# Altium PCB Medidor Sensor.PcbDoc
Units mm, origin at the board's own origin, x right, y up, seen from the top; angles counter-clockwise.
Board outline 44.78 x 57.65 mm, 2 copper layers (Top Layer, Bottom Layer), stack 1.575 mm thick; 70 components, 36 nets, 264 pads, 14 vias.
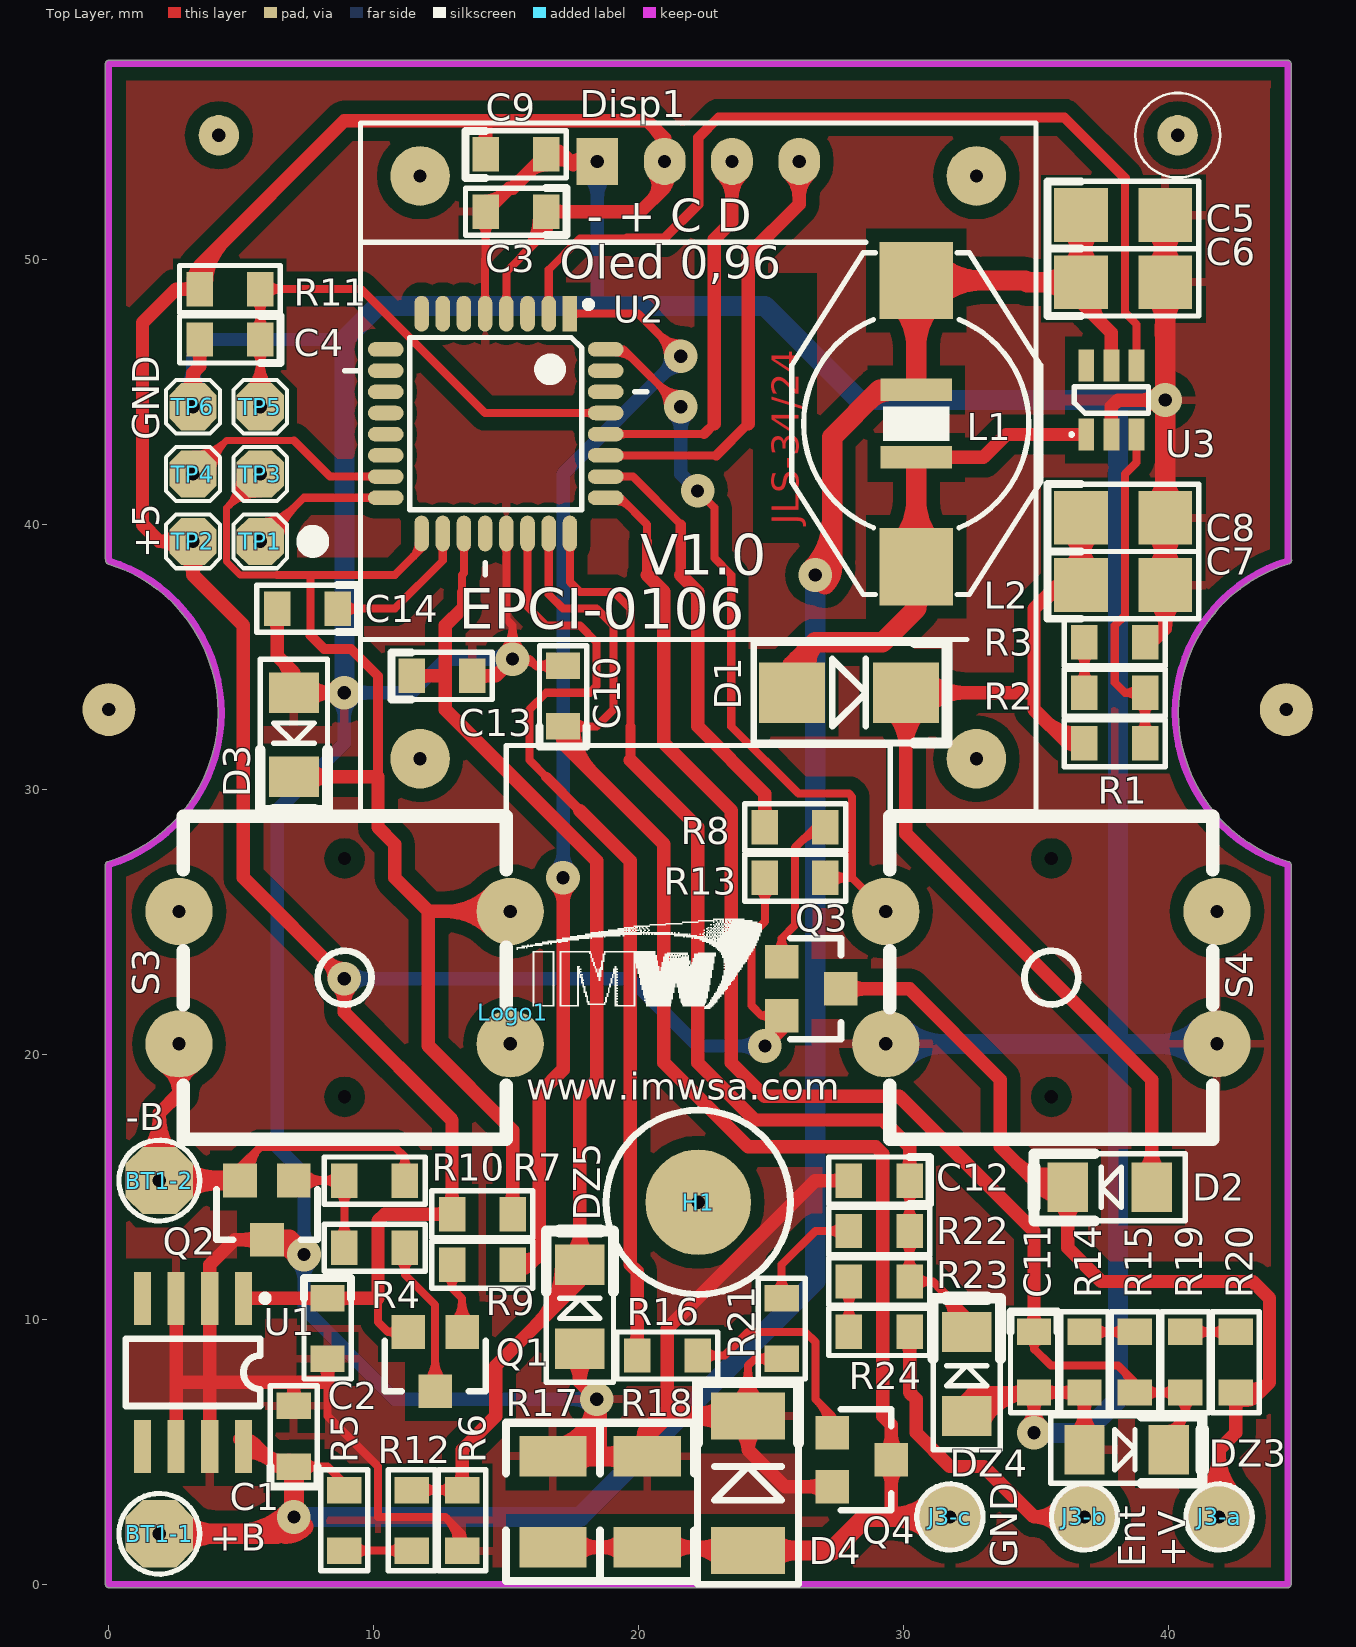
[diagram p0: Top Layer view]
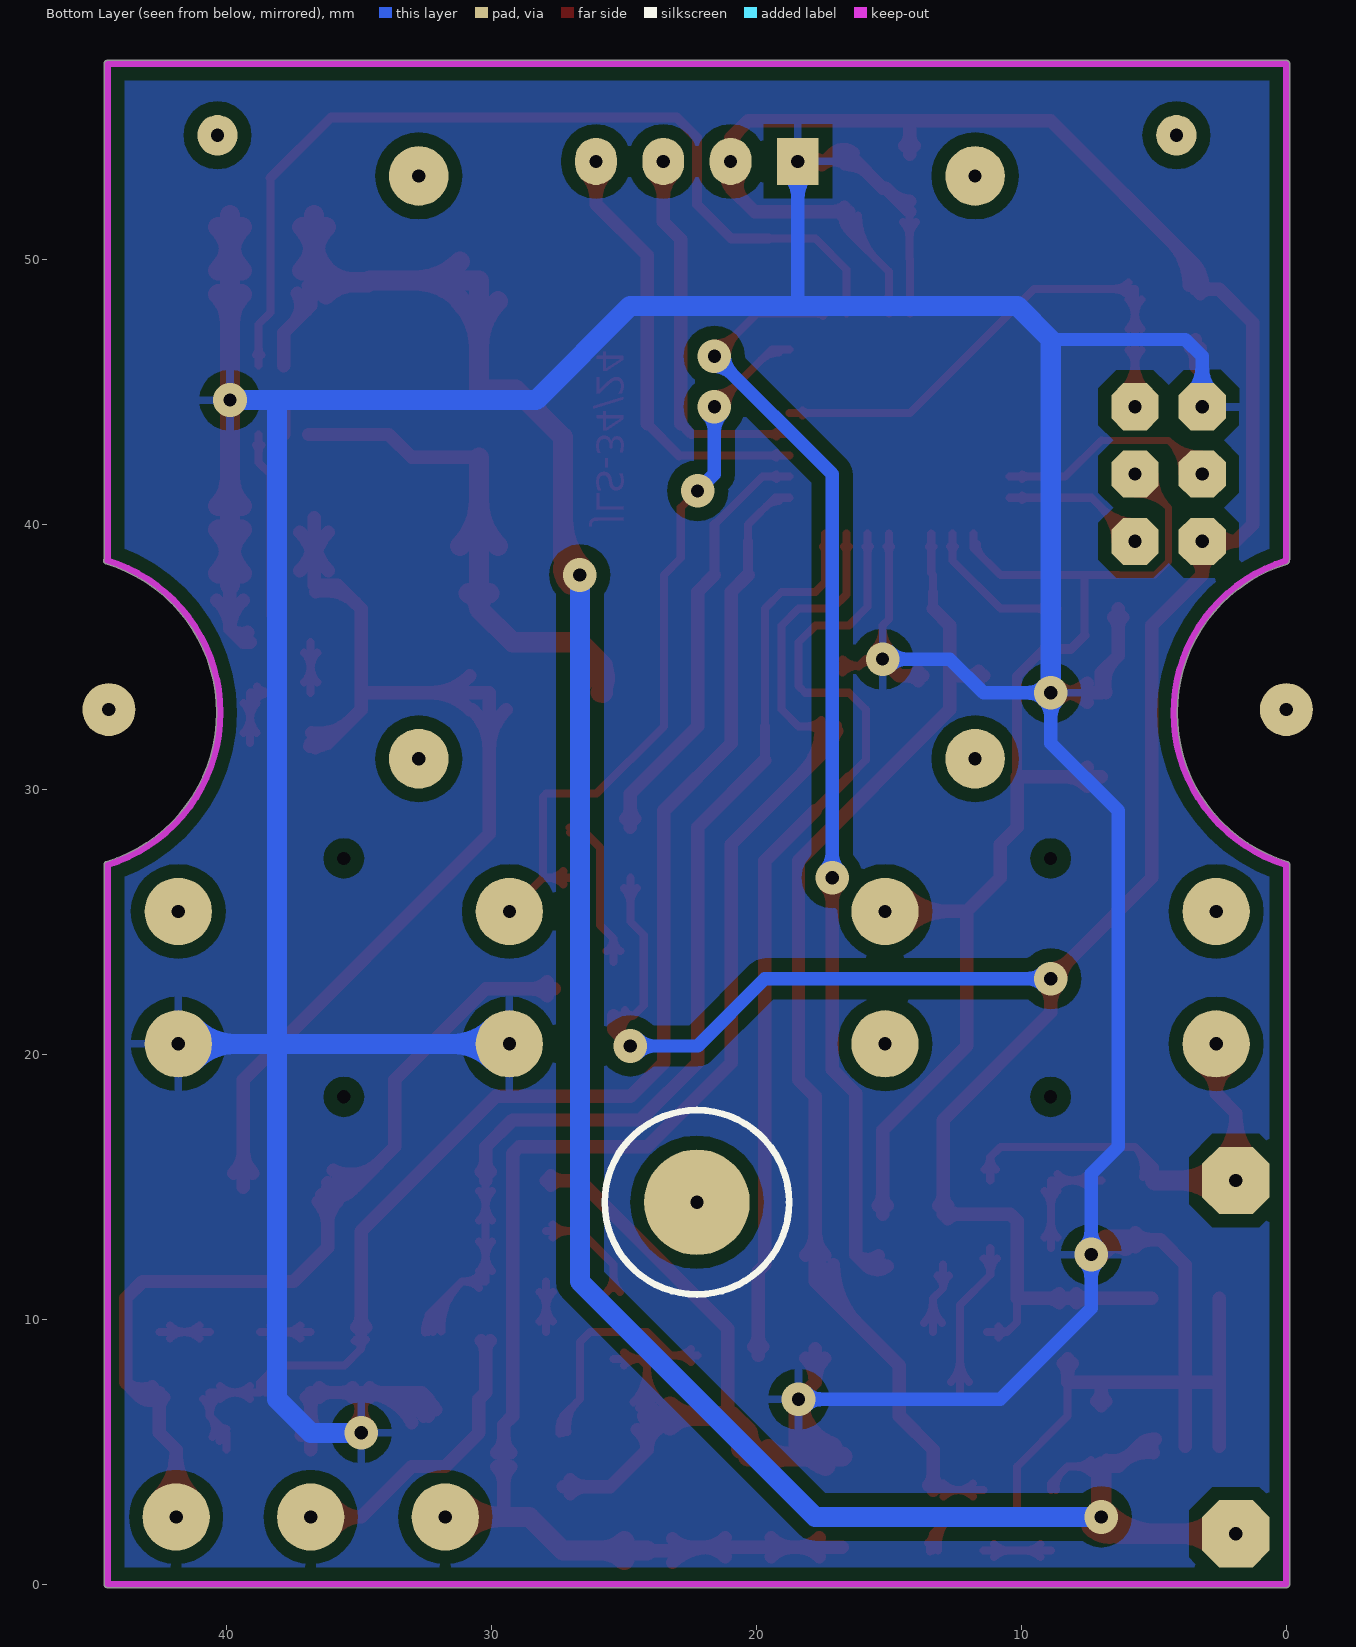
[diagram p1: Bottom Layer view, seen from below]
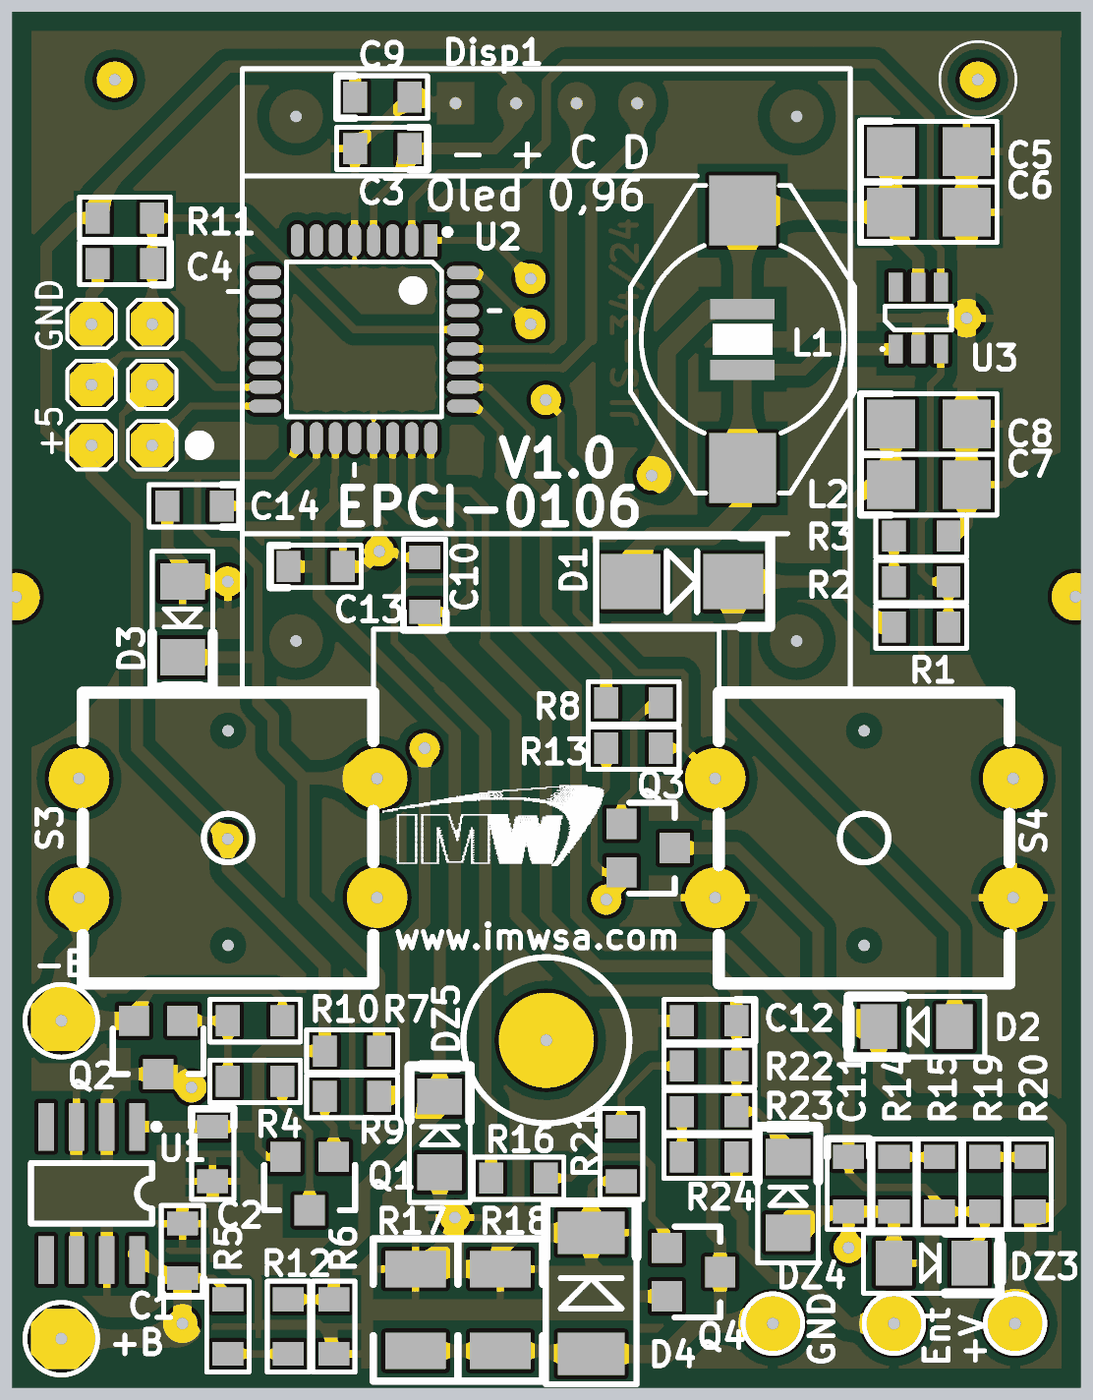
[diagram p2: 3D render of the assembled board from above, using the file's embedded part models]

## Layer stack, top to bottom
Top Layer: signal copper 0.0356
Dielectric: core 1.5037, FR-4, Dk 4.8
Bottom Layer: signal copper 0.0356

## Board outline
-0.127,0 -0.127,27.137 cw(c-0.002,27.16) -0.039,27.282 ccw(c-1.75,32.9) 4.123,32.9 ccw(c-1.75,32.9) -0.022,38.513 cw(c0.016,38.634) -0.111,38.647 cw(c0,38.71) -0.127,38.71 -0.127,57.4 cw(c0,57.4) 0.002,57.527 44.5,57.527 cw(c44.5,57.4) 44.627,57.4 44.627,38.713 cw(c44.52,38.645) 44.647,38.645 cw(c44.52,38.645) 44.556,38.523 cw(c46.25,32.9) 44.556,38.523 ccw(c46.25,32.9) 44.539,27.282 cw(c44.502,27.16) 44.63,27.16 cw(c44.502,27.16) 44.627,27.137 44.627,0 cw(c44.5,0) 44.5,-0.127 0,-0.127 cw(c0,0)

## Design rules (kind name [scope] priority, off if disabled: settings)
Clearance Poly [inpoly] p1: gap=0.508
Clearance Clearance_1 [All] p2: gap=0.229
ComponentClearance [All] p1 off: gap=0.254 collisioncheckmode=3 verticalgap=0.254 showdistances=FALSE
FanoutControl Fanout_BGA [IsBGA] p1 off: bgadir=Out bgaviamode=Centered fanoutstyle=Auto fanoutdirection=Alternating viagrid=0.025 // Fanout_BGA (Default Rule)
FanoutControl Fanout_LCC [IsLCC] p2 off: bgadir=Out bgaviamode=Centered fanoutstyle=Auto fanoutdirection=Alternating viagrid=0.025 // Fanout_LCC (Default Rule)
FanoutControl Fanout_SOIC [IsSOIC] p3 off: bgadir=Out bgaviamode=Centered fanoutstyle=Auto fanoutdirection=Alternating viagrid=0.025 // Fanout_SOIC (Default Rule)
HoleSize [All] p1: absolutevalues=TRUE maxlimit=5 minlimit=0.025 maxpercent=80.000 minpercent=20.000
PolygonConnect [All] p1: connectstyle=Relief reliefconductorwidth=0.305 reliefentries=4 polygonreliefangle="90 Angle"
RoutingVias [All] p1: holewidth=0.6 width=1.397 viastyle="Through Hole" minholewidth=0.5 minwidth=1.27 maxholewidth=0.75 maxwidth=1.524
SolderMaskExpansion [All] p1: expansion=0.178
TestPointUsage [All] p1: valid=0 allowmultiple=FALSE
Testpoint [All] p1: side=15 testpointundercomponent=TRUE minsize=1.016 maxsize=2.54 preferedsize=1.524 minholesize=0 maxholesize=1.016 preferedholesize=0.813 testpointgrid=0.025 style=1023 order=0123456789
Width [All] p1: maxlimit=0.762 minlimit=0.203 preferedwidth=0.305 bottomlayer_minwidth=0.508 bottomlayer_prefwidth=0.508 minimp=50.000000 maximp=50.000000 favimp=50.000000
14 further rules are at their usual default settings.

## Components (designator, comment, footprint, x,y, rotation, side; value= is the part's Value field where it differs from the comment)
BT1-1 "TEST POINT" TP_1#1 1.905,1.905 r90 top
BT1-2 "TEST POINT" TP_1#1 1.905,15.24 r90 top
C1 "10uF/50V" C0805MINIMO 6.985,4.445 r90 top
C2 "100nF" C0805MINIMO 8.255,10.795 r270 top
C3 "100nF" C0805MINIMO 16.51,51.816 r180 top
C4 "100nF" C0805MINIMO 5.715,46.99 r180 top
C5 "10uF 50V X5R" C1206 36.703,51.689 r0 top
C6 "10uF 50V X5R" C1206 36.703,49.149 r0 top
C7 "10uF 50V X5R" C1206 36.703,37.719 r0 top
C8 "10uF 50V X5R" C1206 36.703,40.259 r0 top
C9 "100nF" C0805MINIMO 14.224,53.975 r0 top
C10 "100nF" C0805MINIMO 17.145,32.385 r90 top
C11 "100nF" C0805MINIMO 34.925,9.525 r270 top
C12 "100nF" C0805MINIMO 30.226,15.24 r180 top
C13 "100nF" C0805MINIMO 11.43,34.29 r0 top
C14 "100nF" C0805MINIMO 8.636,36.83 r180 top
D1 "B340LB-13-F" smb 27.94,33.655 r180 top
D2 "MBR0520LT1G" DL35 39.37,14.986 r0 top
D3 "MBR0520LT1G" DL35 6.985,33.655 r90 top
D4 "1N4007" DL45 24.13,1.27 r270 top
Disp1 "O_led 0.96" "Oled 0.96 Nodotech" 22.25,42.164 r0 top locked
DZ3 "5V1 .5W" DL35 36.83,5.08 r180 top
DZ4 "5V1 .5W" DL35 32.385,6.35 r270 top
DZ5 "5V1 .5W" DL35 17.78,8.89 r270 top
H1 "TORNILLO" Tornillo 22.25,14.42 r0 top locked
J3-a "+V" TP_1#2 41.91,2.54 r90 top
J3-b "Ent" TP_1#2 36.83,2.54 r90 top
J3-c "GND" TP_1#2 31.75,2.54 r90 top
L1 "10uHy" L1210 30.48,43.815 r270 top
L2 "22uHy" SMTDR0804 30.48,43.815 r270 top
Logo1 "LOGO" "IMW Serigrafía" 15.24,21.59 r0 top
Q1 "BC807" "SOT23 - BC817" 13.335,9.525 r0 top
Q2 "BC817" "SOT23 - BC817" 6.985,15.24 r0 top
Q3 "BC807" "SOT23 - BC817" 25.4,23.495 r90 top
Q4 "BC817" "SOT23 - BC817" 27.305,5.715 r90 top
R1 "47K 1/10W" R0805MINIMO 36.83,31.75 r0 top
R2 "2K2 1/10W" R0805MINIMO 36.83,33.655 r0 top
R3 "2x330R 1/10W" R0805MINIMO 36.83,35.56 r0 top
R4 "1K 1/8W" R0805MINIMO 8.89,12.7 r0 top
R5 "56K 1/8W" R0805MINIMO 8.89,1.27 r90 top
R6 "10K 1/8W" R0805MINIMO 13.335,1.27 r90 top
R7 "10K 1/8W" R0805MINIMO 15.24,13.97 r180 top
R8 "2K2 1/8W" R0805MINIMO 24.765,28.575 r0 top
R9 "4K7 1/8W" R0805MINIMO 15.24,12.065 r180 top
R10 "10K 1/8W" R0805MINIMO 8.89,15.24 r0 top
R11 "10K 1/10W" R0805MINIMO 5.715,48.895 r180 top
R12 "27K 1/8W" R0805MINIMO 11.43,1.27 r90 top
R13 "10K 1/10W" R0805MINIMO 24.765,26.67 r0 top
R14 "2x33R 1/8W" R0805MINIMO 36.83,7.239 r90 top
R15 "4K7 1/8W" R0805MINIMO 38.735,9.525 r270 top
R16 "2K2 1/8W" R0805MINIMO 22.225,8.636 r180 top
R17 "1R 1/2W" R1210 16.764,4.826 r270 top
R18 "1R 1/2W" R1210 20.32,4.826 r270 top
R19 "27K 1/8W" R0805MINIMO 40.64,9.525 r270 top
R20 "56K 1/8W" R0805MINIMO 42.545,9.525 r270 top
R21 "2x33R 1/8W" R0805MINIMO 25.4,8.509 r90 top
R22 "4K7 1/8W" R0805MINIMO 27.94,13.335 r0 top
R23 "27K 1/8W" R0805MINIMO 27.94,11.43 r0 top
R24 "56K 1/8W" R0805MINIMO 27.94,9.525 r0 top
S3 "" "Pul 12x12 Omron B3F" 8.9,22.9 r180 top locked
S4 "" "Pul 12x12 Omron B3F" 35.58,22.9 r0 top locked
TP1 "MISO" TP_0 5.715,39.37 r180 top
TP2 "+5" TP_0 3.175,39.37 r180 top
TP3 "SCK" TP_0 5.715,41.91 r180 top
TP4 "MOSI" TP_0 3.175,41.91 r180 top
TP5 "RST" TP_0 5.715,44.45 r180 top
TP6 "GND" TP_0 3.175,44.45 r180 top
U1 "LM78L05-soic8" SOIC8-150 5.08,10.795 r270 top
U2 "ATmega328P-AU" TQFP32 14.605,43.815 r270 top
U3 "MT3608" SOT23-6 37.846,44.704 r0 top

## Footprints (in the part's own frame and the unit in brackets; to place one, negate y for a bottom-side part, rotate by r counter-clockwise, add the part's x,y. Pads: shape width x height; smd on the part's side, far side on the other; paste and mask are expansions set on the pad)
C0805MINIMO [mm]
  rect 1x1.3 smd: 1(0,0) 2(2.286,0)
  oct 0.8x1.1 on Top Paste: z(0,0) z(2.286,0)
  silkscreen extent -0.76,-0.89 3.05,0.89, body extent -0.13,-0.64 2.47,0.62, height 0.78
C1206 [mil]
  rect 80x80 smd: 1(0,0) 2(125,0)
  oct 78x78 on Top Paste: z(0,0) z(125,0)
  silkscreen extent -50,-50 175,50, body extent 0,-30 126,33, height 39
DL35 [mil]
  rect 60x74 smd: 1(0,0) 2(-125,0)
  silkscreen extent -175,-50 50,50, body extent -129,-30 9,27, height 57
DL45 [mil]
  rect 70x110 smd: 1(0,0) 2(-200,0)
  silkscreen extent -250,-75 50,75, body extent -205,-62 4,60, height 96
"IMW Serigrafía" [mm]
  silkscreen extent 0.15,0.15 9.4,3.51
L1210 [mm] "Inductor SMD 1210"
  rect 0.85x2.7 smd: 1(-1.275,0) 2(1.275,0)
  silkscreen extent -0.65,-1.25 0.65,1.25, body extent -1.6,-1.25 1.6,1.25, height 2.5
"Oled 0.96 Nodotech" [mm] "22 x 28 x 12 mm"
  round 2.25 hole 0.5 unplated: 0(-10.5,-11) 0(-10.5,11) 0(10.5,-11) 0(10.5,11)
  rect 1.575x1.778 hole 0.5: 1(-3.81,11.55)
  oval 1.575x1.778 hole 0.5: 2(-1.27,11.55) 3(1.27,11.55) 4(3.81,11.55)
  silkscreen extent -12.75,-13 12.75,13, body extent -12.75,-13 12.75,13, height 14.1
"Pul 12x12 Omron B3F" [mm]
  round 2.54 hole 0.5: 1(-6.25,2.5) 1(6.25,2.5) 2(-6.25,-2.5) 2(6.25,-2.5)
  round 0 hole 0.5 unplated: 5(0,4.5) 5(0,-4.5)
  silkscreen extent -6.1,-6.1 6.1,6.1
R0805MINIMO [mm]
  rect 1x1.3 smd: 1(0,0) 2(2.286,0)
  oct 0.8x1.1 on Top Paste: z(0,0) z(2.286,0)
  silkscreen extent -0.76,-0.89 3.05,0.89, body extent 0.14,-0.64 2.14,0.62, height 0.44
R1210 [mil]
  rect 60x100 smd: 1(0,0) 2(135,0)
  oct 58x98 on Top Paste: z(0,0) z(135,0)
  silkscreen extent -50,-70 185,70, body extent 5,-50 131,48, height 24
smb [mm] "Diode SMB DO214AA"
  rect 2.5x2.3 smd: 1(2.15,0) 2(-2.15,0)
  silkscreen extent -3.7,-1.9 3.6,1.9, body extent -2.7,-1.8 2.74,1.76, height 2.31
SMTDR0804 [mm] "Inductor SMTDR0804"
  rect 2.92x2.79 smd: 1(-5.4,0) 2(5.4,0)
  silkscreen extent -6.45,-4.7 6.45,4.7, body extent -6.5,-4.7 6.5,4.7, height 5
SOIC8-150 [mm]
  rect 2x0.65 smd: 1(0,0) 2(0,-1.27) 3(0,-2.54) 4(0,-3.81) 5(5.588,-3.81) 6(5.588,-2.54) 7(5.588,-1.27) 8(5.588,0)
  silkscreen extent -0.13,-4.44 4.06,0.94, body extent -0.3,-4.3 5.9,0.53, height 1.7
"SOT23 - BC817" [mil]
  rect 50x50 smd: 1(0,0) 2(-40,-88) 3(-80,0)
  silkscreen extent -115,-88 35,-13, body extent -98,-95 17,3, height 40
SOT23-6 [mm]
  rect 0.6x1.2 smd: 1(-0.95,-1.3) 2(0,-1.3) 3(0.95,-1.3) 4(0.95,1.3) 5(0,1.3) 6(-0.95,1.3)
  silkscreen extent -1.55,-1.35 1.4,0.5, body extent -1.4,-1.3 1.39,1.13, height 1.09
Tornillo [mil]
  round 157 hole 19.68 unplated: 1(0,0)
  silkscreen extent -137,-137 137,137
TP_0 [mil]
  oct 70x70 hole 19.68: 1(0,0)
  silkscreen extent -40,-40 40,40
TP_1#1 [mm]
  oct 2.54x2.54 hole 0.5: 1(0,0)
  silkscreen extent -1.52,-1.52 1.52,1.52
TP_1#2 [mm]
  round 2.54 hole 0.5: 1(0,0)
  silkscreen extent -1.25,-1.25 1.25,1.25
TQFP32 [mm]
  rect 1.35x0.55 smd: 1(-4.15,2.8)
  oval 1.35x0.55 smd: 2(-4.15,2) 3(-4.15,1.2) 4(-4.15,0.4) 5(-4.15,-0.4) 6(-4.15,-1.2) 7(-4.15,-2) 8(-4.15,-2.8) 17(4.15,-2.8) 18(4.15,-2) 19(4.15,-1.2) 20(4.15,-0.4) 21(4.15,0.4) 22(4.15,1.2) 23(4.15,2) 24(4.15,2.8)
  oval 0.55x1.35 smd: 9(-2.8,-4.15) 10(-2,-4.15) 11(-1.2,-4.15) 12(-0.4,-4.15) 13(0.4,-4.15) 14(1.2,-4.15) 15(2,-4.15) 16(2.8,-4.15) 25(2.8,4.15) 26(2,4.15) 27(1.2,4.15) 28(0.4,4.15) 29(-0.4,4.15) 30(-1.2,4.15) 31(-2,4.15) 32(-2.8,4.15)
  silkscreen extent -4.62,-5.7 5.7,5.7, body extent -4.5,-4.5 4.52,4.52, height 1.1

## Part data
BT1-1 BT1-2: "Tst Point"
C3: library part "CAP ELECTROLITICO", "Capacitor Electrolítico"
C4 C5 C6 C7 C8 C9 C10 C11 C12 C13 C14: library part "CAP NP", "Capacitor"
D1 D2 D4: library part DIODE-SMALL, "DIODE"
DZ3 DZ4 DZ5: library part ZENER-SMALL, "Zener Diode"
J3-a J3-b J3-c TP1 TP2 TP3 TP4 TP5 TP6: library part TESTPOINT, "TEST POINT"
L1 L2: library part "INDUCTOR CHOKE", "INDUCTOR CHOKE"
Q3 Q4: "TRANSISTOR"
R1 R2 R14 R15 R17 R18 R19 R23: library part RES_SMALL, "Resistencia"
R6 R8 R11 R12 R13 R16 R20 R21 R22 R24: library part RESISTOR
U2: library part PIC16F1826

## Free pads (board coordinates)
  round 2 hole 0.5: 0(0,33.02) 0(44.45,33.02)
  round 1.524 hole 0.5 unplated: 1(4.15,54.7) 1(40.35,54.7)

## Via types
v1: diameter 1.27, hole 0.5, Top Layer to Bottom Layer, 14 vias

## Nets (pads, with @x,y where several pads share a name; then routed paths per layer and width w, separated by ;. In a path a pad name is that pad's centre, name@x,y a point inside that pad or via, vN(x,y) a via of type N, cw(c..) or ccw(c..) an arc to the next point about the centre after c; other vN are vias at no path point)
+5V: C2.1 C3.1 C9.1 Disp1.2 Q1.3 Q3.3 R7.2 R11.2 R13.1 TP2.1 U1.1 U2.4 | length 144.7
  Top Layer w0.305: 10.16,10.795 10.16,9.906 10.541,9.525 ; Q1.3@10.867,9.319 ccw(c10.541,9.165) 10.541,9.525 ; Q1.3@10.867,9.731 cw(c10.541,9.885) 10.541,9.525 ; Q1.3 10.541,9.525 ; U2.4@14.918,48.452 ccw(c14.709,48.661) 15.005,48.661 ccw(c15.301,48.661) U2.4@15.092,48.452 ; U2.4 15.005,49.549 16.51,51.054 ; 15.484,50.028 ccw(c13.846,51.666) C3.1@16.162,51.666 ; 16.004,50.548 ccw(c14.886,51.666) C3.1@16.467,51.666 ; C3.1@16.332,51.367 cw(c16.145,51.054) 16.51,51.054 ; C3.1 16.51,51.054 ; 16.525,51.069 ccw(c15.927,51.666) C3.1@16.772,51.666 ; C3.1@16.688,51.367 ccw(c16.875,51.054) 16.51,51.054 ; R13.1@24.519,26.274 cw(c23.926,25.681) 24.765,25.681 cw(c25.604,25.681) R13.1@25.011,26.274 ; R13.1 24.765,25.019 24.257,24.511 24.257,21.844 24.638,21.463 ; Q3.3@24.964,21.257 ccw(c24.638,21.103) 24.638,21.463 ; Q3.3@24.964,21.669 cw(c24.638,21.823) 24.638,21.463 ; Q3.3 24.638,21.463
  Top Layer w0.508: TP2.1@2.667,38.989 ccw(c1.905,38.418) 1.905,39.37 ; TP2.1@2.667,39.751 cw(c1.905,40.322) 1.905,39.37 ; TP2.1@2.794,38.862 cw(c2.223,38.1) 3.175,38.1 ; R11.2@3.167,49.045 cw(c4.319,49.045) 3.504,49.859 ; R11.2@3.255,48.721 ccw(c2.835,48.301) 2.835,48.895 ccw(c2.835,49.489) R11.2@3.255,49.069 ; R11.2@3.255,49.219 ccw(c2.835,49.639) 3.429,49.639 ccw(c4.023,49.639) R11.2@3.603,49.219 ; TP2.1@3.556,38.862 ccw(c4.127,38.1) 3.175,38.1 ; R11.2@3.675,49.045 cw(c6.053,49.045) 4.371,50.726 ; U1.1 C2.1 10.16,10.795 10.16,13.716 10.414,13.97 R7.2 12.954,17.526 8.89,21.59 v1(8.89,22.86) 5.08,26.67 5.08,36.195 3.175,38.1 ; C2.1@7.931,10.621 ccw(c7.511,10.201) 7.511,10.795 ccw(c7.511,11.389) C2.1@7.931,10.969 ; v1@8.509,22.86 ccw(c7.589,22.86) 8.24,23.51 ccw(c8.89,24.161) v1@8.89,23.241 ; C2.1@8.579,10.621 cw(c8.999,10.201) 8.999,10.795 cw(c8.999,11.389) C2.1@8.579,10.969 ; v1@8.621,22.591 cw(c7.97,21.94) 8.89,21.94 cw(c9.81,21.94) v1@9.159,22.591 ; R7.2@12.78,13.796 ccw(c12.36,13.376) 12.36,13.97 ccw(c12.36,14.564) R7.2@12.78,14.144 ; R7.2@12.78,14.294 ccw(c12.36,14.714) 12.954,14.714 ccw(c13.548,14.714) R7.2@13.128,14.294 ; C9.1@14.05,54.299 ccw(c13.63,54.719) 14.224,54.719 ccw(c14.818,54.719) C9.1@14.398,54.299 ; C9.1 14.224,55.245 ; C3.1 20.066,51.816 20.98,52.73 Disp1.2 20.98,54.585 20.32,55.245 14.224,55.245 ; C3.1@16.684,51.642 cw(c17.104,51.222) 17.104,51.816 cw(c17.104,52.41) C3.1@16.684,51.99 ; 20.507,52.257 ccw(c19.965,52.8) Disp1.2@20.564,53.279 ; 20.609,54.956 cw(c19.717,54.064) Disp1.2@20.955,53.82 ; 20.908,52.658 ccw(c20.41,53.156) Disp1.2@20.96,53.597 ; v1(24.765,20.32) 25.4,20.955 Q3.3 ; v1@25.019,20.574 ccw(c24.642,20.951) Q3.3@25.084,21.25 ; 1.905,39.37 TP2.1 3.175,38.1 ; 1.905,39.37 1.27,40.005 1.27,47.625 2.54,48.895 R11.2 3.429,49.784 8.89,55.245 14.224,55.245
  Bottom Layer w0.508: v1(8.89,22.86) 19.685,22.86 22.225,20.32 v1(24.765,20.32) ; v1@9.159,22.591 cw(c9.81,21.94) 9.81,22.86 cw(c9.81,23.78) v1@9.159,23.129 ; v1@24.496,20.051 ccw(c23.845,19.4) 23.845,20.32 ccw(c23.845,21.24) v1@24.496,20.589
+12: C7.1 C8.1 D1.2 D2.1 R1.1 | length 57.9
  Top Layer w0.508: D1.2@29.456,33.021 cw(c27.927,31.492) 30.09,31.492 cw(c32.253,31.492) D1.2@30.724,33.021 ; D1.2@30.824,33.021 cw(c32.353,31.492) 32.353,33.655 cw(c32.353,35.818) D1.2@30.824,34.289 ; 35.13,37.035 cw(c36.283,35.882) C7.1@36.646,37.471 ; 35.318,32.627 ccw(c36.534,33.844) R1.1@36.793,32.143 ; 36.028,31.917 ccw(c36.722,32.611) R1.1@36.869,31.641 ; C7.1@36.164,38.258 ccw(c34.863,39.559) 36.703,39.559 ccw(c38.543,39.559) C7.1@37.242,38.258 ; C8.1@36.164,39.72 cw(c34.863,38.419) 36.703,38.419 cw(c38.543,38.419) C8.1@37.242,39.72 ; R1.1@36.656,31.576 ccw(c36.236,31.156) 36.236,31.75 ccw(c36.236,32.344) R1.1@36.656,31.924 ; C8.1 C7.1 35.814,37.719 34.925,36.83 34.925,33.655 ; R1.1 36.195,31.75 34.925,33.02 34.925,33.655 ; D2.1@39.011,15.523 ccw(c38.144,16.39) 39.37,16.39 ccw(c40.596,16.39) D2.1@39.729,15.523 ; D2.1 39.37,19.05 30.09,28.33 D1.2 34.925,33.655
+BAT: BT1-1.1 C1.1 C5.1 C6.1 L1.1 L2.1 R5.2 U1.8 U3.5 | length 121.9
  Top Layer w0.305: C1.1 8.255,4.445 8.89,3.81 R5.2 ; C1.1@7.381,4.199 cw(c7.974,3.606) 7.974,4.445 cw(c7.974,5.284) C1.1@7.381,4.691 ; 8.481,4.219 cw(c7.937,3.676) R5.2@8.698,3.562
  Top Layer w0.508: U1.8@4.938,5.466 cw(c5.04,4.796) 5.52,5.275 ; U1.8@5.015,4.964 cw(c5.227,3.561) 6.231,4.564 ; U1.8 5.588,5.207 ; U1.8@5.101,5.139 cw(c5.316,4.427) 5.842,4.953 ; 5.715,5.08 5.588,5.207 ; 5.831,4.964 ccw(c6.562,5.696) C1.1@6.783,4.685 ; C1.1 6.35,4.445 5.588,5.207 ; C6.1 36.83,49.022 36.83,48.26 37.846,47.244 U3.5 ; C6.1@36.917,49.012 ccw(c37.552,48.605) 37.019,48.071 ; C6.1@37.345,48.738 ccw(c38.096,48.256) 37.465,47.625
  Top Layer w0.762: BT1-1.1 6.35,1.905 v1(6.985,2.54) C1.1 ; BT1-1.1@2.534,1.276 cw(c4.051,-0.241) 4.051,1.905 cw(c4.051,4.051) BT1-1.1@2.534,2.534 ; 4.839,1.905 ccw(c4.839,4.686) v1@6.805,2.72 ; 6.678,1.905 ccw(c6.678,2.847) v1@7.344,2.181 ; v1@26.49,38.28 ccw(c24.524,40.246) 27.305,40.246 ; v1(26.67,38.1) 27.305,38.735 27.305,43.307 29.088,45.09 L1.1 L2.1 34.605,49.215 34.671,49.149 C6.1 C5.1 ; v1@27.029,37.741 ccw(c26.363,38.407) 27.305,38.407 ; 28.683,44.685 cw(c29.555,43.812) L1.1@29.555,45.046 ; 28.855,44.857 cw(c29.368,44.343) L1.1@29.544,45.047 ; L2.1@29.763,48.433 cw(c28.032,46.702) 30.48,46.702 cw(c32.928,46.702) L2.1@31.197,48.433 ; L2.1@31.197,48.498 cw(c32.928,46.767) 32.928,49.215 cw(c32.928,51.663) L2.1@31.197,49.932 ; C6.1@36.254,48.7 ccw(c35.17,47.616) 35.17,49.149 ccw(c35.17,50.682) 36.254,49.598 ccw(c35.17,50.682) 36.703,50.682 ccw(c38.236,50.682) C6.1@37.152,49.598 ; C5.1@36.254,51.24 cw(c35.17,50.156) 36.703,50.156 cw(c38.236,50.156) C5.1@37.152,51.24
  Bottom Layer w0.762: v1(6.985,2.54) 17.78,2.54 26.67,11.43 v1(26.67,38.1)
-BAT: BT1-2.1 Q2.3 R10.2 S3.1@2.65,20.4 | length 29.5
  Top Layer w0.305: Q2.3 4.953,15.748 5.715,16.51 ; Q2.3@5.124,15.288 cw(c5.964,15.525) 5.347,16.142 ; Q2.3@5.418,15.371 cw(c6.538,15.687) 5.715,16.51 ; R10.2@10.954,15.658 ccw(c10.564,16.129) 11.176,16.129 ; R10.2 11.176,16.129 ; R10.2@11.398,15.658 cw(c11.788,16.129) 11.176,16.129 ; 5.715,16.51 10.795,16.51 11.176,16.129
  Top Layer w0.508: BT1-2.1@1.187,15.958 ccw(c-0.548,17.693) 1.905,17.693 ccw(c4.358,17.693) BT1-2.1@2.623,15.958 ; BT1-2.1 1.905,17.78 2.65,18.525 ; S3.1@2.095,19.549 cw(c1.428,18.525) 2.65,18.525 ; S3.1@2.65,20.4 2.65,18.525 ; S3.1@3.205,19.549 ccw(c3.872,18.525) 2.65,18.525
  Top Layer w0.762: BT1-2.1 Q2.3 ; BT1-2.1@2.534,14.611 cw(c4.051,13.094) 4.051,15.24 cw(c4.051,17.386) BT1-2.1@2.534,15.869
ALIM.5: R8.1 U2.26 | length 17.7
  Top Layer w0.305: U2.26 19.78,41.815 21.59,40.005 ; U2.26@19.242,41.728 cw(c19.451,41.519) 19.451,41.815 cw(c19.451,42.111) U2.26@19.242,41.902
  Top Layer w0.381: 21.59,38.1 21.59,40.005
  Top Layer w0.508: 21.59,38.1 22.225,37.465 22.225,32.385 24.765,29.845 R8.1 ; R8.1@24.591,28.899 ccw(c24.171,29.319) 24.765,29.319 ccw(c25.359,29.319) R8.1@24.939,28.899
ALIM.12: U2.2 U3.4 | length 36.5
  Top Layer w0.305: U2.2@16.518,48.452 ccw(c16.309,48.661) 16.605,48.661 ccw(c16.901,48.661) U2.2@16.692,48.452 ; U2.2 16.605,49.625 17.78,50.8 19.558,50.8 ; 38.354,53.086 38.354,48.006 38.796,47.564 U3.4 ; U3.4@38.692,46.408 ccw(c38.44,46.66) 38.796,46.66 ccw(c39.152,46.66) U3.4@38.9,46.408
  Top Layer w0.381: 19.558,50.8 20.955,50.8 22.25,52.095 22.25,54.61 23.012,55.372 36.068,55.372 38.354,53.086
CORRIENTE: C10.1 D4.1 J3-c.1 Q4.2 R17.2 R18.2 U2.23 | length 89.1
  Top Layer w0.305: U2.23@16.518,39.178 cw(c16.309,38.969) 16.605,38.969 cw(c16.901,38.969) U2.23@16.692,39.178 ; U2.23 16.605,37.37 17.145,36.83 18.415,36.83 19.05,36.195 19.05,33.02 18.415,32.385 C10.1 ; C10.1@17.541,32.139 cw(c18.134,31.546) 18.134,32.385 cw(c18.134,33.224) C10.1@17.541,32.631
  Top Layer w0.508: R17.2 R18.2 22.479,1.397 ; C10.1@16.971,32.211 cw(c16.551,31.791) 17.145,31.791 cw(c17.739,31.791) C10.1@17.319,32.211 ; C10.1@17.033,32.385 ccw(c18.296,32.385) 17.403,31.492 ; 17.145,31.733 cw(c17.634,31.733) C10.1@17.409,32.167 ; C10.1 17.145,31.75 20.955,27.94 20.955,19.685 24.13,16.51 28.956,16.51 29.21,16.256 29.21,6.35 29.54,6.02 Q4.2 29.54,2.54 ; C10.1@17.541,32.385 ccw(c20.03,32.385) 18.27,30.625 ; R17.2@17.631,1.038 cw(c18.498,0.171) 18.498,1.397 cw(c18.498,2.623) R17.2@17.631,1.756 ; R18.2@19.453,1.038 ccw(c18.586,0.171) 18.586,1.397 ccw(c18.586,2.623) R18.2@19.453,1.756 ; R18.2@21.187,1.038 cw(c22.054,0.171) 22.054,1.397 cw(c22.054,2.623) R18.2@21.187,1.756 ; 21.782,1.397 cw(c21.782,-0.57) D4.1@23.173,0.821 ; 22.396,1.397 ccw(c22.396,2.496) D4.1@23.173,1.719 ; D4.1@23.036,1.026 ccw(c22.479,0.794) 22.479,1.397 ; D4.1@23.051,0.992 ccw(c22.606,0.775) 22.606,1.27 ; D4.1@23.051,1.548 cw(c22.606,1.765) 22.606,1.27 ; D4.1@23.151,1.695 cw(c22.479,2.302) 22.479,1.397 ; D4.1 22.606,1.27 ; Q4.2@29.271,4.43 cw(c28.62,3.779) 29.54,3.779 cw(c30.46,3.779) Q4.2@29.81,4.43 ; Q4.2@29.271,4.968 ccw(c28.62,5.619) 29.54,5.619 ccw(c30.46,5.619) Q4.2@29.81,4.968 ; 22.479,1.397 22.606,1.27
  Top Layer w0.762: D4.1 27.305,1.27 28.575,2.54 29.54,2.54 J3-c.1 ; D4.1@24.997,0.911 cw(c25.864,0.044) 25.864,1.27 cw(c25.864,2.496) D4.1@24.997,1.629 ; J3-c.1@31.121,1.911 ccw(c29.604,0.394) 29.604,2.54 ccw(c29.604,4.686) J3-c.1@31.121,3.169
ENC: R9.1 U2.1 | length 51.5
  Top Layer w0.305: U2.1 19.98,47.965 v1(21.59,46.355) ; U2.1@17.492,47.878 cw(c17.701,47.669) 17.701,47.965 cw(c17.701,48.261) U2.1@17.492,48.052 ; v1@21.107,46.355 ccw(c19.942,46.355) 20.766,47.179 ccw(c21.59,48.003) v1@21.59,46.838
  Top Layer w0.508: R9.1@15.073,12.013 ccw(c15.446,12.465) 15.861,12.051 ; R9.1 15.875,12.065 16.256,12.446 ; R9.1@15.397,12.405 ccw(c15.804,12.898) 16.256,12.446 ; R9.1@15.414,11.891 cw(c15.834,11.471) 15.834,12.065 cw(c15.834,12.659) R9.1@15.414,12.239 ; v1@16.876,26.401 cw(c16.225,25.75) 17.145,25.75 cw(c18.065,25.75) v1@17.414,26.401 ; v1(17.145,26.67) 17.145,19.431 16.256,18.542 16.256,12.446
  Bottom Layer w0.508: v1@16.876,26.939 ccw(c16.225,27.59) 17.145,27.59 ccw(c18.065,27.59) v1@17.414,26.939 ; v1(17.145,26.67) 17.145,41.91 v1(21.59,46.355) ; v1@21.209,46.355 cw(c20.289,46.355) 20.94,45.705 cw(c21.59,45.054) v1@21.59,45.974
GND: C1.2 C2.2 C3.2 C4.2 C5.2 C6.2 C7.2 C8.2 C9.2 C10.2 C11.2 C12.2 C13.2 C14.2 D3.1 D4.2 Disp1.1 DZ3.1 DZ4.1 DZ5.1 Q2.2 Q4.3 R3.2 R6.1 R14.1 R17.1 R18.1 R21.1 S4.2 TP6.1 U1.2 U1.3 U1.6 U1.7 U2.5 U2.21 U3.2 | length 392.9
  Top Layer w0.305: 8.255,7.62 8.255,6.35 10.16,4.445 10.16,2.54 12.7,2.54 13.335,1.905 ; 12.736,2.504 cw(c11.718,1.486) R6.1@13.143,1.276 ; R6.1@13.148,1.563 ccw(c12.929,1.905) 13.335,1.905 ; 13.165,2.075 cw(c12.466,1.376) R6.1@13.444,1.232 ; R6.1 13.335,1.905 ; R6.1@13.522,1.563 cw(c13.741,1.905) 13.335,1.905 ; C3.2@13.978,51.42 cw(c13.385,50.827) 14.224,50.827 cw(c15.063,50.827) C3.2@14.47,51.42 ; U2.5@14.118,48.452 ccw(c13.909,48.661) 14.205,48.661 ccw(c14.501,48.661) U2.5@14.292,48.452 ; U2.5 14.205,50.019 14.224,50.038 C3.2 ; v1@14.899,35.266 ccw(c14.075,36.09) 15.24,36.09 ccw(c16.405,36.09) v1@15.581,35.266 ; U2.21@14.918,39.178 cw(c14.709,38.969) 15.005,38.969 cw(c15.301,38.969) U2.21@15.092,39.178 ; U2.21 15.005,36.43 15.24,36.195 v1(15.24,34.925) 15.875,34.925 16.129,34.671 C10.2 ; v1@15.324,34.768 cw(c15.656,34.145) 16.156,34.644 ; C10.2@16.749,34.425 ccw(c16.156,33.832) 16.156,34.671 ccw(c16.156,35.51) C10.2@16.749,34.917 ; D4.2@23.609,6.871 ccw(c22.352,8.128) 24.13,8.128 ccw(c25.908,8.128) D4.2@24.651,6.871 ; D4.2@23.825,6.655 ccw(c23.088,7.392) 24.13,7.392 ccw(c25.172,7.392) D4.2@24.435,6.655 ; D4.2 24.13,8.255 24.384,8.509 R21.1 ; R21.1@25.004,8.263 ccw(c24.411,7.67) 24.411,8.509 ccw(c24.411,9.348) R21.1@25.004,8.755 ; C11.2 R14.1 ; C11.2@35.321,6.993 cw(c35.914,6.4) 35.914,7.239 cw(c35.914,8.078) C11.2@35.321,7.485 ; R14.1@36.434,6.993 ccw(c35.841,6.4) 35.841,7.239 ccw(c35.841,8.078) R14.1@36.434,7.485
  Top Layer w0.508: U1.6 2.54,7.62 ; U1.3 2.54,7.62 ; TP6.1@2.794,44.958 ccw(c2.223,45.72) 3.175,45.72 ; TP6.1 3.175,45.72 ; C4.2@3.255,46.666 cw(c2.835,46.246) 3.429,46.246 cw(c4.023,46.246) C4.2@3.603,46.666 ; C4.2 3.429,45.974 3.175,45.72 ; TP6.1@3.556,44.958 cw(c4.127,45.72) 3.175,45.72 ; U1.7 3.81,7.62 ; Q2.2@5.7,12.735 ccw(c5.049,12.085) 5.049,13.005 ccw(c5.049,13.925) Q2.2@5.7,13.274 ; Q2.2 4.75,13.005 3.81,12.065 U1.2 3.81,7.62 ; C14.2@6.176,36.506 cw(c5.756,36.086) 6.35,36.086 cw(c6.944,36.086) C14.2@6.524,36.506 ; C14.2 6.35,35.052 6.985,34.417 D3.1 v1(8.89,33.655) ; 6.485,34.917 cw(c5.583,34.015) D3.1@6.807,33.655 ; C1.2@6.811,6.905 ccw(c6.391,7.325) 6.985,7.325 ccw(c7.579,7.325) C1.2@7.159,6.905 ; C1.2 6.985,7.62 ; D3.1@7.522,33.296 cw(c8.389,32.429) 8.389,33.655 cw(c8.389,34.881) D3.1@7.522,34.014 ; C2.2@8.081,8.335 cw(c7.661,7.915) 8.255,7.915 cw(c8.849,7.915) C2.2@8.429,8.335 ; C2.2 8.255,7.62 6.985,7.62 ; v1@8.621,33.386 ccw(c7.97,32.735) 7.97,33.655 ccw(c7.97,34.575) v1@8.621,33.924 ; C13.2 14.605,34.29 v1(15.24,34.925) ; C13.2@13.89,34.116 cw(c14.31,33.696) 14.31,34.29 cw(c14.31,34.884) C13.2@13.89,34.464 ; C3.2 15.113,52.705 15.24,52.705 C9.2 17.145,53.975 17.406,53.714 ; C3.2@14.224,52.212 ccw(c14.224,53.168) 14.9,52.492 ; 15.834,53.299 cw(c16.51,52.623) C9.2@16.51,53.579 ; C9.2@16.347,54.03 cw(c16.716,53.566) 17.135,53.985 ; C9.2@16.422,54.072 cw(c16.682,53.342) 17.23,53.89 ; C9.2@16.663,53.632 cw(c17.072,53.117) 17.537,53.583 ; C9.2@16.684,53.801 cw(c17.104,53.381) 17.104,53.975 cw(c17.104,54.569) C9.2@16.684,54.149 ; DZ5.1@17.421,8.531 cw(c16.554,7.664) 17.78,7.664 cw(c19.006,7.664) DZ5.1@18.139,8.531 ; DZ5.1 17.78,7.62 v1(18.415,6.985) ; Disp1.1@18.005,53.405 ccw(c17.406,52.979) 17.406,53.714 ; Disp1.1@18.005,54.023 cw(c17.406,54.449) 17.406,53.714 ; Disp1.1 17.406,53.714 ; 21.082,6.35 21.082,9.652 26.67,15.24 C12.2 ; D4.2@23.749,5.842 cw(c23.178,5.08) 24.13,5.08 ; D4.2 24.13,5.08 ; D4.2@24.511,5.842 ccw(c25.082,5.08) 24.13,5.08 ; Q4.3@27.036,3.414 ccw(c26.385,2.763) 26.385,3.683 ccw(c26.385,4.603) Q4.3@27.036,3.952 ; Q4.3 25.527,3.683 24.13,5.08 ; C12.2@27.766,15.066 ccw(c27.346,14.646) 27.346,15.24 ccw(c27.346,15.834) C12.2@27.766,15.414 ; DZ4.1@32.118,6.595 cw(c33.207,5.996) 33.207,7.239 ; DZ4.1 32.385,6.985 32.639,7.239 C11.2 ; DZ4.1@32.563,6.35 cw(c34.066,5.524) 34.066,7.239 ; DZ4.1@33.008,6.105 cw(c34.925,5.052) C11.2 ; C11.2@34.601,7.065 ccw(c34.181,6.645) 34.181,7.239 ccw(c34.181,7.833) C11.2@34.601,7.413 ; v1@34.656,5.984 ccw(c34.005,6.635) 34.925,6.635 ccw(c35.845,6.635) v1@35.194,5.984 ; C11.2@34.751,7.065 cw(c34.331,6.645) 34.925,6.645 cw(c35.519,6.645) C11.2@35.099,7.065 ; v1(34.925,5.715) C11.2 ; C11.2@35.249,7.065 cw(c35.669,6.645) 35.669,7.239 cw(c35.669,7.833) C11.2@35.249,7.413 ; DZ3.1@36.471,5.617 ccw(c35.604,6.484) 36.83,6.484 ccw(c38.056,6.484) DZ3.1@37.189,5.617 ; R14.1@36.506,7.065 ccw(c36.086,6.645) 36.086,7.239 ccw(c36.086,7.833) R14.1@36.506,7.413 ; R14.1@36.656,7.065 cw(c36.236,6.645) 36.83,6.645 cw(c37.424,6.645) R14.1@37.004,7.065 ; DZ3.1 R14.1 C11.2 ; U3.2 37.846,44.45 38.1,44.704 v1(39.878,44.704) ; R3.2 39.37,35.56 39.878,36.068 ; R3.2@39.211,35.937 ccw(c39.447,36.499) 39.878,36.068 ; C7.2@39.384,37.139 cw(c38.471,36.068) 39.878,36.068 ; v1@39.609,44.435 ccw(c38.958,43.784) 38.958,44.704 ccw(c38.958,45.624) v1@39.609,44.973 ; C7.2 39.878,36.068 ; C7.2@40.372,37.139 ccw(c41.285,36.068) 39.878,36.068 ; 2.54,7.62 3.81,7.62 ; 3.81,7.62 6.985,7.62
  Top Layer w0.762: Q2.2@6.081,12.777 cw(c6.52,11.879) v1@7.226,12.586 ; v1@7.145,12.32 ccw(c5.969,11.652) Q2.2 6.807,13.005 v1(7.366,12.446) ; R17.1 18.415,4.826 ; R17.1@17.144,5.185 ccw(c16.505,6.985) v1(18.415,6.985) 18.415,4.826 ; R17.1@17.4,4.467 ccw(c16.888,5.905) 18.415,5.905 ; R18.1@19.543,4.557 ccw(c18.892,3.906) 18.892,4.826 ccw(c18.892,5.746) R18.1@19.543,5.095 ; R18.1@20.057,5.102 ccw(c19.473,5.715) 20.32,5.715 ; R18.1@20.583,5.102 cw(c21.167,5.715) 20.32,5.715 ; D4.2@23.263,5.991 ccw(c22.396,5.124) 22.396,6.35 ccw(c22.396,7.576) D4.2@23.263,6.709 ; D4.2 21.082,6.35 20.955,6.35 20.32,5.715 ; C7.2@39.429,38.168 ccw(c38.345,39.252) 39.878,39.252 ccw(c41.411,39.252) C7.2@40.327,38.168 ; C8.2@39.429,39.81 cw(c38.345,38.726) 39.878,38.726 cw(c41.411,38.726) C8.2@40.327,39.81 ; C8.2@39.429,40.708 ccw(c38.345,41.792) 39.878,41.792 ccw(c41.411,41.792) C8.2@40.327,40.708 ; C6.2@39.429,48.7 cw(c38.345,47.616) 39.878,47.616 cw(c41.411,47.616) C6.2@40.327,48.7 ; C6.2@39.429,49.598 ccw(c38.345,50.682) 39.878,50.682 ccw(c41.411,50.682) C6.2@40.327,49.598 ; C5.2@39.429,51.24 cw(c38.345,50.156) 39.878,50.156 cw(c41.411,50.156) C5.2@40.327,51.24 ; C7.2 C8.2 v1(39.878,44.704) C6.2 C5.2 ; R17.1@17.541,4.557 cw(c18.192,3.906) 18.192,4.826 ; R17.1@17.541,4.557 cw(c18.192,3.906) 18.192,4.826 ; R17.1@17.541,4.557 cw(c18.192,3.906) 18.192,4.826 ; R17.1@17.541,5.095 ccw(c18.192,5.746) 18.192,4.826 ; R17.1@17.541,5.095 ccw(c18.192,5.746) 18.192,4.826 ; R17.1@17.541,5.095 ccw(c18.192,5.746) 18.192,4.826 ; 18.415,4.826 R18.1 20.32,5.715
  Bottom Layer w0.508: TP6.1@2.726,44.899 ccw(c1.642,45.983) 3.175,45.983 ccw(c4.708,45.983) TP6.1@3.624,44.899 ; TP6.1 3.175,46.355 3.81,46.99 8.89,46.99 ; v1@7.097,12.177 cw(c6.446,11.526) 7.366,11.526 cw(c8.286,11.526) v1@7.635,12.177 ; v1@7.097,12.715 ccw(c6.446,13.366) 7.366,13.366 ccw(c8.286,13.366) v1@7.635,12.715 ; v1@8.621,33.386 cw(c7.97,32.735) 8.89,32.735 cw(c9.81,32.735) 9.159,33.386 cw(c9.81,32.735) 9.81,33.655 cw(c9.81,34.575) v1@9.159,33.924 ; v1@14.971,34.656 ccw(c14.32,34.005) 14.32,34.925 ccw(c14.32,35.845) v1@14.971,35.194 ; v1(15.24,34.925) 12.7,34.925 11.43,33.655 v1(8.89,33.655) 8.89,31.75 6.35,29.21 6.35,16.51 7.366,15.494 v1(7.366,12.446) 7.366,10.414 10.795,6.985 v1(18.415,6.985) ; Disp1.1@18.063,53.235 cw(c17.152,52.325) 18.44,52.325 cw(c19.728,52.325) Disp1.1@18.817,53.235 ; v1@18.146,6.716 ccw(c17.495,6.065) 17.495,6.985 ccw(c17.495,7.905) v1@18.146,7.254 ; 18.44,48.26 Disp1.1
  Bottom Layer w0.762: v1(8.89,33.655) 8.89,46.99 10.16,48.26 18.44,48.26 24.765,48.26 28.321,44.704 38.1,44.704 ; S4.2@29.33,20.4 38.1,20.4 ; S4.2@29.959,19.771 cw(c31.476,18.254) 31.476,20.4 cw(c31.476,22.546) S4.2@29.959,21.029 ; v1(34.925,5.715) 36.83,5.715 38.1,6.985 38.1,20.4 ; v1(39.878,44.704) 38.1,44.704 ; S4.2@41.201,19.771 ccw(c39.684,18.254) 39.684,20.4 ccw(c39.684,22.546) S4.2@41.201,21.029 ; S4.2@41.83,20.4 38.1,20.4 ; 38.1,20.4 38.1,44.704
MED.I: R16.2 U2.22 | length 38
  Top Layer w0.305: U2.22@15.718,39.178 cw(c15.509,38.969) 15.805,38.969 cw(c16.101,38.969) U2.22@15.892,39.178 ; U2.22 15.805,36.9 16.51,36.195 17.78,36.195 18.415,35.56 18.415,33.909 18.161,33.655 16.51,33.655 15.875,33.02 15.875,31.115 16.51,30.48
  Top Layer w0.381: 16.51,30.48 17.78,29.21
  Top Layer w0.508: 17.78,29.21 19.685,27.305 19.685,12.065 19.939,11.811 R16.2 ; R16.2@19.765,8.96 ccw(c19.345,9.38) 19.939,9.38 ccw(c20.533,9.38) R16.2@20.113,8.96
MISO: TP1.1 U2.16 | length 10.3
  Top Layer w0.305: TP1.1 7.36,41.015 U2.16 ; TP1.1@5.715,39.802 ccw(c5.715,40.844) 6.452,40.107 ccw(c7.189,39.37) TP1.1@6.147,39.37 ; TP1.1@5.715,40.107 ccw(c5.715,41.885) 6.972,40.627 ccw(c8.23,39.37) TP1.1@6.452,39.37 ; U2.16@9.968,40.928 ccw(c9.759,40.719) 9.759,41.015 ccw(c9.759,41.311) U2.16@9.968,41.102
MOSI: TP4.1 U2.15 | length 13.5
  Top Layer w0.254: TP4.1 4.445,43.18 ; TP4.1@3.184,42.418 ccw(c3.204,43.575) 4.022,42.757 ccw(c4.84,41.939) TP4.1@3.683,41.919 ; TP4.1@3.188,42.672 ccw(c3.218,44.407) 4.445,43.18 ; TP4.1@3.937,41.923 cw(c5.672,41.953) 4.445,43.18 ; 6.985,43.18 4.445,43.18
  Top Layer w0.305: 6.985,43.18 8.35,41.815 U2.15 ; U2.15@9.968,41.728 ccw(c9.759,41.519) 9.759,41.815 ccw(c9.759,42.111) U2.15@9.968,41.902
NetC14_1: C14.1 U2.18 | length 7.5
  Top Layer w0.305: C14.1 10.795,36.83 12.605,38.64 U2.18 ; C14.1@8.882,36.584 cw(c9.475,35.991) 9.475,36.83 cw(c9.475,37.669) C14.1@8.882,37.076 ; U2.18@12.518,39.178 cw(c12.309,38.969) 12.605,38.969 cw(c12.901,38.969) U2.18@12.692,39.178
NetD1_1: D1.1 L1.2 L2.2 U3.1 | length 27.4
  Top Layer w0.508: L1.2 33.015,42.54 33.879,43.404 U3.1
  Top Layer w0.762: D1.1 25.79,34.68 26.67,35.56 ; D1.1@25.896,33.659 cw(c26.713,34.21) 26.016,34.906 ; D1.1@26.528,34.085 cw(c27.494,34.736) 26.67,35.56 ; L2.2@29.763,39.197 ccw(c28.032,40.928) 30.48,40.928 ccw(c32.928,40.928) L2.2@31.197,39.197 ; L2.2@30.091,37.414 cw(c29.848,36.83) 30.48,36.83 ; L1.2 L2.2 30.48,36.83 ; L2.2@30.869,37.414 ccw(c31.112,36.83) 30.48,36.83 ; 26.67,35.56 29.21,35.56 30.48,36.83
NetD2_2: D2.2 J3-a.1 Q3.2 R20.2 | length 50.5
  Top Layer w0.508: Q3.2 30.226,22.479 33.655,19.05 33.655,16.51 35.179,14.986 ; Q3.2@27.905,22.21 cw(c28.555,21.559) 28.555,22.479 cw(c28.555,23.399) Q3.2@27.905,22.748 ; 34.252,15.913 ccw(c35.318,16.98) D2.2@35.974,15.621 ; 34.758,15.407 ccw(c35.648,16.297) D2.2@36.195,15.164 ; 35.263,14.902 ccw(c35.977,15.615) D2.2@36.416,14.706 ; D2.2@35.789,14.681 ccw(c35.179,14.224) 35.179,14.986 ; D2.2@35.789,15.291 cw(c35.179,15.748) 35.179,14.986 ; D2.2@35.836,14.449 cw(c34.969,13.582) 36.195,13.582 cw(c37.421,13.582) D2.2@36.554,14.449 ; J3-a.1@41.192,3.258 ccw(c39.457,4.993) 41.91,4.993 ccw(c44.363,4.993) J3-a.1@42.628,3.258 ; J3-a.1 41.91,5.08 42.545,5.715 R20.2 43.434,7.239 43.815,7.62 ; R20.2@42.371,7.065 cw(c41.951,6.645) 42.545,6.645 cw(c43.139,6.645) R20.2@42.719,7.065 ; R20.2@42.577,7.005 ccw(c42.866,7.577) 43.319,7.124 ; R20.2@42.806,7.459 ccw(c43.199,8.236) 43.815,7.62 ; R20.2@42.869,7.065 cw(c43.289,6.645) 43.289,7.239 cw(c43.289,7.833) R20.2@42.869,7.413 ; 35.179,14.986 D2.2 36.195,12.7 37.465,11.43 43.18,11.43 43.815,10.795 43.815,7.62
NetJ3-b_1: J3-b.1 R24.2 | length 14.4
  Top Layer w0.508: R24.2@30.052,9.201 cw(c29.632,8.781) 30.226,8.781 cw(c30.82,8.781) R24.2@30.4,9.201 ; R24.2@30.226,8.89 30.226,7.239 30.48,6.985 30.48,5.715 31.75,4.445 33.02,4.445 34.925,2.54 ; J3-b.1@35.986,1.974 ccw(c34.925,1.262) 34.925,2.54 ; J3-b.1@35.986,3.106 cw(c34.925,3.818) 34.925,2.54 ; J3-b.1 34.925,2.54
NetQ1_1: Q1.1 R9.2 | length 5.6
  Top Layer w0.305: R9.2@12.732,11.647 cw(c12.342,11.176) 12.954,11.176 ; R9.2 12.954,11.176 ; Q1.1@12.994,9.866 ccw(c12.17,10.69) 13.335,10.69 ccw(c14.5,10.69) Q1.1@13.676,9.866 ; R9.2@13.176,11.647 ccw(c13.566,11.176) 12.954,11.176 ; Q1.1 13.335,10.795 12.954,11.176
NetQ1_2: Q1.2 R4.2 | length 9
  Top Layer w0.305: R4.2@10.93,12.304 cw(c10.337,11.711) 11.176,11.711 cw(c12.015,11.711) R4.2@11.422,12.304 ; R4.2 11.176,11.684 12.319,10.541 Q1.2 ; Q1.2@11.978,7.631 ccw(c11.154,8.455) 12.319,8.455 ccw(c13.484,8.455) Q1.2@12.66,7.631
NetQ2_1: Q2.1 R4.1 R10.1 | length 10.2
  Top Layer w0.305: Q2.1 R10.1 R4.1 ; Q2.1@7.326,14.899 cw(c8.15,14.075) 8.15,15.24 cw(c8.15,16.405) Q2.1@7.326,15.581 ; R4.1@8.644,13.096 ccw(c8.051,13.689) 8.89,13.689 ccw(c9.729,13.689) R4.1@9.136,13.096 ; R10.1@8.644,14.844 cw(c8.051,14.251) 8.89,14.251 cw(c9.729,14.251) R10.1@9.136,14.844 ; R10.1@8.644,14.994 ccw(c8.051,14.401) 8.051,15.24 ccw(c8.051,16.079) R10.1@8.644,15.486
NetQ3_1: Q3.1 R8.2 | length 8.2
  Top Layer w0.305: Q3.1@25.137,23.9 ccw(c24.823,24.384) 25.4,24.384 ; Q3.1 25.4,24.384 ; Q3.1@25.663,23.9 cw(c25.977,24.384) 25.4,24.384 ; 26.124,28.029 cw(c26.981,27.173) R8.2@27.049,28.382 ; R8.2 26.67,28.575 25.908,27.813 25.908,24.892 25.4,24.384
NetQ4_1: Q4.1 R16.1 | length 12.1
  Top Layer w0.305: R16.1 23.241,8.636 24.13,9.525 26.289,9.525 26.67,9.144 26.67,6.985 27.305,6.35 Q4.1 ; R16.1@22.471,8.39 cw(c23.064,7.797) 23.064,8.636 cw(c23.064,9.475) R16.1@22.471,8.882 ; 26.768,6.887 cw(c25.849,5.967) Q4.1@27.13,5.745 ; 27.184,6.471 cw(c26.557,5.845) Q4.1@27.43,5.693
NetR1_2: R1.2 R2.2 U3.3 | length 17.2
  Top Layer w0.305: U3.3@38.692,43 cw(c38.44,42.748) 38.796,42.748 cw(c39.152,42.748) U3.3@38.9,43 ; U3.3 38.796,42.352 38.354,41.91 38.354,36.576 37.973,36.195 37.973,34.036 38.354,33.655 ; R2.2@38.853,33.427 ccw(c38.354,32.994) 38.354,33.655 ; R2.2@38.853,33.883 cw(c38.354,34.316) 38.354,33.655 ; R1.2@38.87,32.146 ccw(c38.277,32.739) 39.116,32.739 ccw(c39.955,32.739) R1.2@39.362,32.146 ; R2.2@38.87,33.259 cw(c38.277,32.666) 39.116,32.666 cw(c39.955,32.666) R2.2@39.362,33.259 ; R1.2 R2.2 38.354,33.655
NetR2_1: R2.1 R3.1 | length 4.5
  Top Layer w0.305: R2.1@36.584,34.051 ccw(c35.991,34.644) 36.83,34.644 ccw(c37.669,34.644) R2.1@37.076,34.051 ; R3.1@36.584,35.164 cw(c35.991,34.571) 36.83,34.571 cw(c37.669,34.571) R3.1@37.076,35.164 ; R2.1 R3.1
NetR5_1: R5.1 R12.1 | length 5.2
  Top Layer w0.305: R5.1 R12.1 ; R5.1@9.286,1.024 cw(c9.879,0.431) 9.879,1.27 cw(c9.879,2.109) R5.1@9.286,1.516 ; R12.1@11.034,1.024 ccw(c10.441,0.431) 10.441,1.27 ccw(c10.441,2.109) R12.1@11.034,1.516
NetR14_2: R14.2 R15.1 | length 4.5
  Top Layer w0.305: R14.2 R15.1 ; R14.2@37.226,9.279 cw(c37.819,8.686) 37.819,9.525 cw(c37.819,10.364) R14.2@37.226,9.771 ; R15.1@38.339,9.279 ccw(c37.746,8.686) 37.746,9.525 ccw(c37.746,10.364) R15.1@38.339,9.771
NetR19_1: R19.1 R20.1 | length 4.5
  Top Layer w0.305: R19.1 R20.1 ; R19.1@41.036,9.279 cw(c41.629,8.686) 41.629,9.525 cw(c41.629,10.364) R19.1@41.036,9.771 ; R20.1@42.149,9.279 ccw(c41.556,8.686) 41.556,9.525 ccw(c41.556,10.364) R20.1@42.149,9.771
NetR21_2: R21.2 R22.1 | length 6.6
  Top Layer w0.305: R21.2@25.154,11.041 ccw(c24.561,11.634) 25.4,11.634 ccw(c26.239,11.634) R21.2@25.646,11.041 ; R21.2@25.4,11.176 25.4,12.065 26.67,13.335 R22.1 ; R22.1@27.694,13.089 ccw(c27.101,12.496) 27.101,13.335 ccw(c27.101,14.174) R22.1@27.694,13.581
NetR23_1: R23.1 R24.1 | length 4.5
  Top Layer w0.305: R24.1@27.694,9.921 ccw(c27.101,10.514) 27.94,10.514 ccw(c28.779,10.514) R24.1@28.186,9.921 ; R23.1@27.694,11.034 cw(c27.101,10.441) 27.94,10.441 cw(c28.779,10.441) R23.1@28.186,11.034 ; R24.1 R23.1
P.ENC: D3.2 R7.1 S3.2@15.15,25.4 TP3.1 U2.17 | length 58.4
  Top Layer w0.254: TP3.1@4.953,41.897 cw(c3.218,41.867) 4.445,40.64 ; TP3.1@5.207,41.901 cw(c4.05,41.881) 4.868,41.063 cw(c5.686,40.245) TP3.1@5.706,41.402 ; TP3.1@5.702,41.148 ccw(c5.672,39.413) 4.445,40.64 ; TP3.1 4.445,40.64 ; 6.35,38.1 4.953,38.1 4.445,38.608 4.445,40.64
  Top Layer w0.305: 6.35,38.1 7.62,38.1 ; 7.62,35.814 7.62,38.1 ; 11.486,38.791 ccw(c11.012,39.265) U2.17@11.682,39.265 ; U2.17 11.805,39.11 10.795,38.1 7.62,38.1
  Top Layer w0.381: 7.62,35.814 8.128,35.306 9.144,35.306 10.16,34.29 10.16,30.48
  Top Layer w0.508: D3.2 10.16,30.48 10.16,28.575 10.795,27.94 10.795,26.67 12.065,25.4 ; D3.2@7.522,30.121 cw(c8.389,29.254) 8.389,30.48 cw(c8.389,31.706) D3.2@7.522,30.839 ; S3.2@14.432,24.682 ccw(c12.697,22.947) 12.697,25.4 ccw(c12.697,27.853) S3.2@14.432,26.118 ; R7.1@15.066,14.294 ccw(c14.646,14.714) 15.24,14.714 ccw(c15.834,14.714) R7.1@15.414,14.294 ; S3.2@15.15,25.4 12.065,25.4 ; R7.1 15.24,17.145 12.065,20.32 12.065,25.4
PULSADOR2: R13.2 S4.1@29.33,25.4 U2.32 | length 33.5
  Top Layer w0.305: U2.32 19.425,46.615 v1(21.59,44.45) ; U2.32@19.155,46.492 cw(c19.155,45.545) 19.825,46.215 ; v1@21.107,44.45 ccw(c19.942,44.45) 20.766,45.274 ccw(c21.59,46.098) v1@21.59,44.933 ; v1(22.225,41.275) 22.86,40.64 22.86,38.735 23.495,38.1 23.495,32.385 26.035,29.845 27.94,29.845 28.06,29.725 28.06,26.67 ; R13.2 28.06,26.67 ; R13.2@27.297,26.424 cw(c27.89,25.831) 27.89,26.67 cw(c27.89,27.509) R13.2@27.297,26.916 ; S4.1@29.33,25.4 28.06,26.67
  Bottom Layer w0.508: v1@21.321,44.181 cw(c20.67,43.53) 21.59,43.53 cw(c22.51,43.53) v1@21.859,44.181 ; v1(21.59,44.45) 21.59,41.91 v1(22.225,41.275)
RST: C4.1 R11.1 TP5.1 U2.29 | length 29.6
  Top Layer w0.305: TP5.1@5.194,44.971 ccw(c3.937,46.228) 5.715,46.228 ccw(c7.493,46.228) TP5.1@6.236,44.971 ; TP5.1@5.41,44.755 ccw(c4.673,45.492) 5.715,45.492 ccw(c6.757,45.492) TP5.1@6.02,44.755 ; C4.1@5.469,46.594 cw(c4.876,46.001) 5.715,46.001 cw(c6.554,46.001) C4.1@5.961,46.594 ; C4.1@5.469,47.386 ccw(c4.876,47.979) 5.715,47.979 ccw(c6.554,47.979) C4.1@5.961,47.386 ; R11.1@5.469,48.499 cw(c4.876,47.906) 5.715,47.906 cw(c6.554,47.906) R11.1@5.961,48.499 ; TP5.1 R11.1 9.525,48.895 14.205,44.215 U2.29 ; R11.1@5.961,48.649 cw(c6.554,48.056) 6.554,48.895 cw(c6.554,49.734) R11.1@5.961,49.141 ; U2.29@18.268,44.128 ccw(c18.059,43.919) 18.059,44.215 ccw(c18.059,44.511) U2.29@18.268,44.302
SCL: Disp1.3 U2.28 | length 16.9
  Top Layer w0.305: U2.28 22.46,43.415 ; U2.28@19.242,43.328 cw(c19.451,43.119) 19.451,43.415 cw(c19.451,43.711) U2.28@19.242,43.502
  Top Layer w0.381: 22.46,43.415 22.86,43.815
  Top Layer w0.508: 22.86,43.815 22.86,50.775 23.52,51.435 Disp1.3 ; Disp1.3@23.143,53.235 cw(c22.232,52.325) 23.52,52.325 cw(c24.808,52.325) Disp1.3@23.897,53.235
SDA: Disp1.4 U2.27 | length 19.1
  Top Layer w0.305: U2.27 22.93,42.615 ; U2.27@19.242,42.528 cw(c19.451,42.319) 19.451,42.615 cw(c19.451,42.911) U2.27@19.242,42.702
  Top Layer w0.381: 22.93,42.615 24.13,43.815
  Top Layer w0.508: 24.13,43.815 24.13,50.165 26.06,52.095 Disp1.4 ; Disp1.4@25.683,53.235 cw(c24.772,52.325) 26.06,52.325 cw(c27.348,52.325) Disp1.4@26.437,53.235
V.BAT: C13.1 DZ5.2 R6.2 R12.2 U2.19 | length 55
  Top Layer w0.305: R12.2 R6.2 ; R12.2@11.826,3.31 cw(c12.419,2.717) 12.419,3.556 cw(c12.419,4.395) R12.2@11.826,3.802 ; R6.2@12.939,3.31 ccw(c12.346,2.717) 12.346,3.556 ccw(c12.346,4.395) R6.2@12.939,3.802 ; U2.19@13.318,39.178 cw(c13.109,38.969) 13.405,38.969 cw(c13.701,38.969) U2.19@13.492,39.178 ; 13.335,37.465 13.335,38.1 13.405,38.17 U2.19
  Top Layer w0.381: 13.335,36.83 13.335,37.465
  Top Layer w0.508: C13.1 12.7,34.29 ; C13.1@11.604,34.116 cw(c12.024,33.696) 12.024,34.29 cw(c12.024,34.884) C13.1@11.604,34.464 ; R6.2@13.161,3.73 ccw(c12.741,4.15) 13.335,4.15 ccw(c13.929,4.15) R6.2@13.509,3.73 ; R6.2 13.335,5.08 14.605,6.35 14.605,8.255 17.78,11.43 DZ5.2 17.78,18.415 18.415,19.05 18.415,27.305 12.7,33.02 12.7,34.29 ; 13.335,36.83 12.7,36.195 12.7,34.29 ; 16.16,9.81 ccw(c13.906,12.065) DZ5.2@17.094,12.065 ; 17.027,10.677 ccw(c15.64,12.065) DZ5.2@17.602,12.065 ; DZ5.2@17.421,12.424 ccw(c16.554,13.291) 17.78,13.291 ccw(c19.006,13.291) DZ5.2@18.139,12.424
V.ENT: C12.1 DZ4.2 R22.2 R23.2 U2.24 | length 52.8
  Top Layer w0.305: U2.24@17.318,39.178 cw(c17.109,38.969) 17.405,38.969 cw(c17.701,38.969) U2.24@17.492,39.178 ; U2.24 17.405,37.84 17.78,37.465 19.05,37.465 19.685,36.83 19.685,32.385 ; R23.2@29.98,11.826 ccw(c29.387,12.419) 30.226,12.419 ccw(c31.065,12.419) R23.2@30.472,11.826 ; R22.2@29.98,12.939 cw(c29.387,12.346) 30.226,12.346 cw(c31.065,12.346) R22.2@30.472,12.939 ; R22.2@29.98,13.731 ccw(c29.387,14.324) 30.226,14.324 ccw(c31.065,14.324) R22.2@30.472,13.731 ; C12.1@29.98,14.844 cw(c29.387,14.251) 30.226,14.251 cw(c31.065,14.251) C12.1@30.472,14.844 ; C12.1 R22.2 R23.2 31.115,11.43 32.385,10.16 DZ4.2 ; R23.2@30.472,11.184 cw(c31.065,10.591) 31.065,11.43 cw(c31.065,12.269) R23.2@30.472,11.676 ; 31.199,11.346 cw(c29.495,9.642) DZ4.2@31.903,9.538 ; 31.689,10.856 cw(c30.435,9.601) DZ4.2@32.207,9.525 ; 32.179,10.366 cw(c31.375,9.561) DZ4.2@32.512,9.512
  Top Layer w0.381: 19.685,31.115 19.685,32.385
  Top Layer w0.508: 19.685,31.115 22.225,28.575 22.225,19.685 24.384,17.526 29.21,17.526 30.226,16.51 C12.1 ; C12.1@30.052,15.564 ccw(c29.632,15.984) 30.226,15.984 ccw(c30.82,15.984) C12.1@30.4,15.564
V.SAL: C11.1 DZ3.2 R15.2 R19.2 U2.25 | length 60.9
  Top Layer w0.305: U2.25 19.31,41.015 20.32,40.005 20.32,39.37 ; U2.25@19.155,40.892 cw(c19.155,40.222) 19.629,40.696 ; C11.1@34.738,9.232 cw(c34.519,8.89) 34.925,8.89 ; 34.925,8.873 cw(c35.254,8.873) C11.1@35.167,9.19 ; C11.1 34.925,8.89 ; C11.1@35.112,9.232 ccw(c35.331,8.89) 34.925,8.89 ; 38.263,8.092 cw(c37.561,7.391) R15.2@38.543,7.245 ; R15.2@39.131,6.993 cw(c39.724,6.4) 39.724,7.239 cw(c39.724,8.078) R15.2@39.131,7.485 ; DZ3.2 40.005,5.715 40.64,6.35 ; DZ3.2@40.005,5.867 ccw(c40.005,6.235) DZ3.2@40.265,5.975 ; R19.2@40.244,6.993 ccw(c39.651,6.4) 39.651,7.239 ccw(c39.651,8.078) R19.2@40.244,7.485 ; DZ3.2@40.27,5.409 cw(c40.745,5.681) 40.358,6.068 ; R19.2@40.394,6.993 cw(c39.801,6.4) 40.64,6.4 cw(c41.479,6.4) R19.2@40.886,6.993 ; DZ3.2@40.534,5.56 cw(c41.104,5.886) 40.64,6.35 ; R19.2@40.64,6.985 R19.2 ; 34.925,8.89 35.56,8.255 38.1,8.255 38.735,7.62 R15.2 R19.2 ; 40.64,6.35 R19.2
  Top Layer w0.381: 20.32,38.1 20.32,39.37
  Top Layer w0.508: 20.32,38.1 20.955,37.465 20.955,31.75 23.495,29.21 23.495,19.685 24.765,18.415 29.845,18.415 34.925,13.335 C11.1 ; C11.1@34.751,9.699 ccw(c34.331,10.119) 34.925,10.119 ccw(c35.519,10.119) C11.1@35.099,9.699
pads on no net: C1.z C2.z C3.z C4.z C5.z C6.z C7.z C8.z C9.z C10.z C11.z C12.z C13.z C14.z Disp1.0 H1.1 R1.z R2.z R3.z R4.z R5.z R6.z R7.z R8.z R9.z R10.z R11.z R12.z R13.z R14.z R15.z R16.z R17.z R18.z R19.z R20.z R21.z R22.z R23.z R24.z S3.1@15.15,20.4 S3.2@2.65,25.4 S3.5 S4.1@41.83,25.4 S4.5 U1.4 U1.5 U2.3 U2.6 U2.7 U2.8 U2.9 U2.10 U2.11 U2.12 U2.13 U2.14 U2.20 U2.30 U2.31 U3.6

## Polygon pours and split planes (outlines as drawn)
GND on Top Layer "top" (solid): 0,57.15 44.5,57.15 43.815,56.465 43.815,38.735 40.64,35.56 40.64,30.48 41.275,29.845 44.45,26.67 44.45,25.4 44.45,0.05 44.5,0 0,0 0,26.67 3.81,30.48 3.81,35.56 0,39.37 0,57.4
GND on Bottom Layer "GND" (solid, remove dead copper, pour order 1000): 0,0 44.5,0 44.45,27.305 41.275,29.21 40.64,33.02 41.91,36.83 44.5,38.665 44.5,57.4 0,57.4 0,38.71 2.54,36.83 4.445,33.02 3.175,29.21 0,27.305

## Keep-outs
Keep-Out Layer:
  lines w0.254: -0.002,27.16 ccw(c-1.75,32.9) 0.016,38.634 ; 0,27.153 0,0 44.5,0 44.5,27.153 ; 0,38.71 0,57.4 44.5,57.4 44.5,38.989 44.5,38.665 44.52,38.645 ccw(c46.25,32.9) 44.502,27.16

## Other copper
Top Layer:
  text "JLS-34/24" at 26.035,40.005 h1.02 r90

## Silkscreen, mask and mechanical layers (free items; w line width, h text height)
Top Overlay:
  circle w0.1: c40.35,54.7 r1.6
  circle w0.635: c7.696,39.37 r0.305
  text "V1.0" at 20.066,38.1 h1.52
  text "EPCI-0106" at 13.208,36.068 h1.52
  text "www.imwsa.com" at 15.748,18.288 h1.02
  text "-B" at 0.635,17.145 h1.02
  text "+B" at 3.81,1.27 h1.02
Mechanical 1:
  lines w0.2: 4.15,50.7 40.35,50.7

## Text inside footprints (layer, text, board x,y; h text height)
Disp1: Top Overlay "Oled 0,96" at 17.018,49.276 h1.25; Top Overlay "- + C D" at 18.05,51.054 h1.25